# Altium PCB Daughter Board.PcbDoc
Units mil, origin at the board's own origin, x right, y up, seen from the top; angles counter-clockwise.
Board outline 4750 x 3250 mil, 4 copper layers (Top Layer, Layer 1, Layer 2, Bottom Layer), stack 23.756 mil thick; 7 components, 7 nets, 60 pads, 0 vias.
Unrouted connection lines stored in the file: 6.
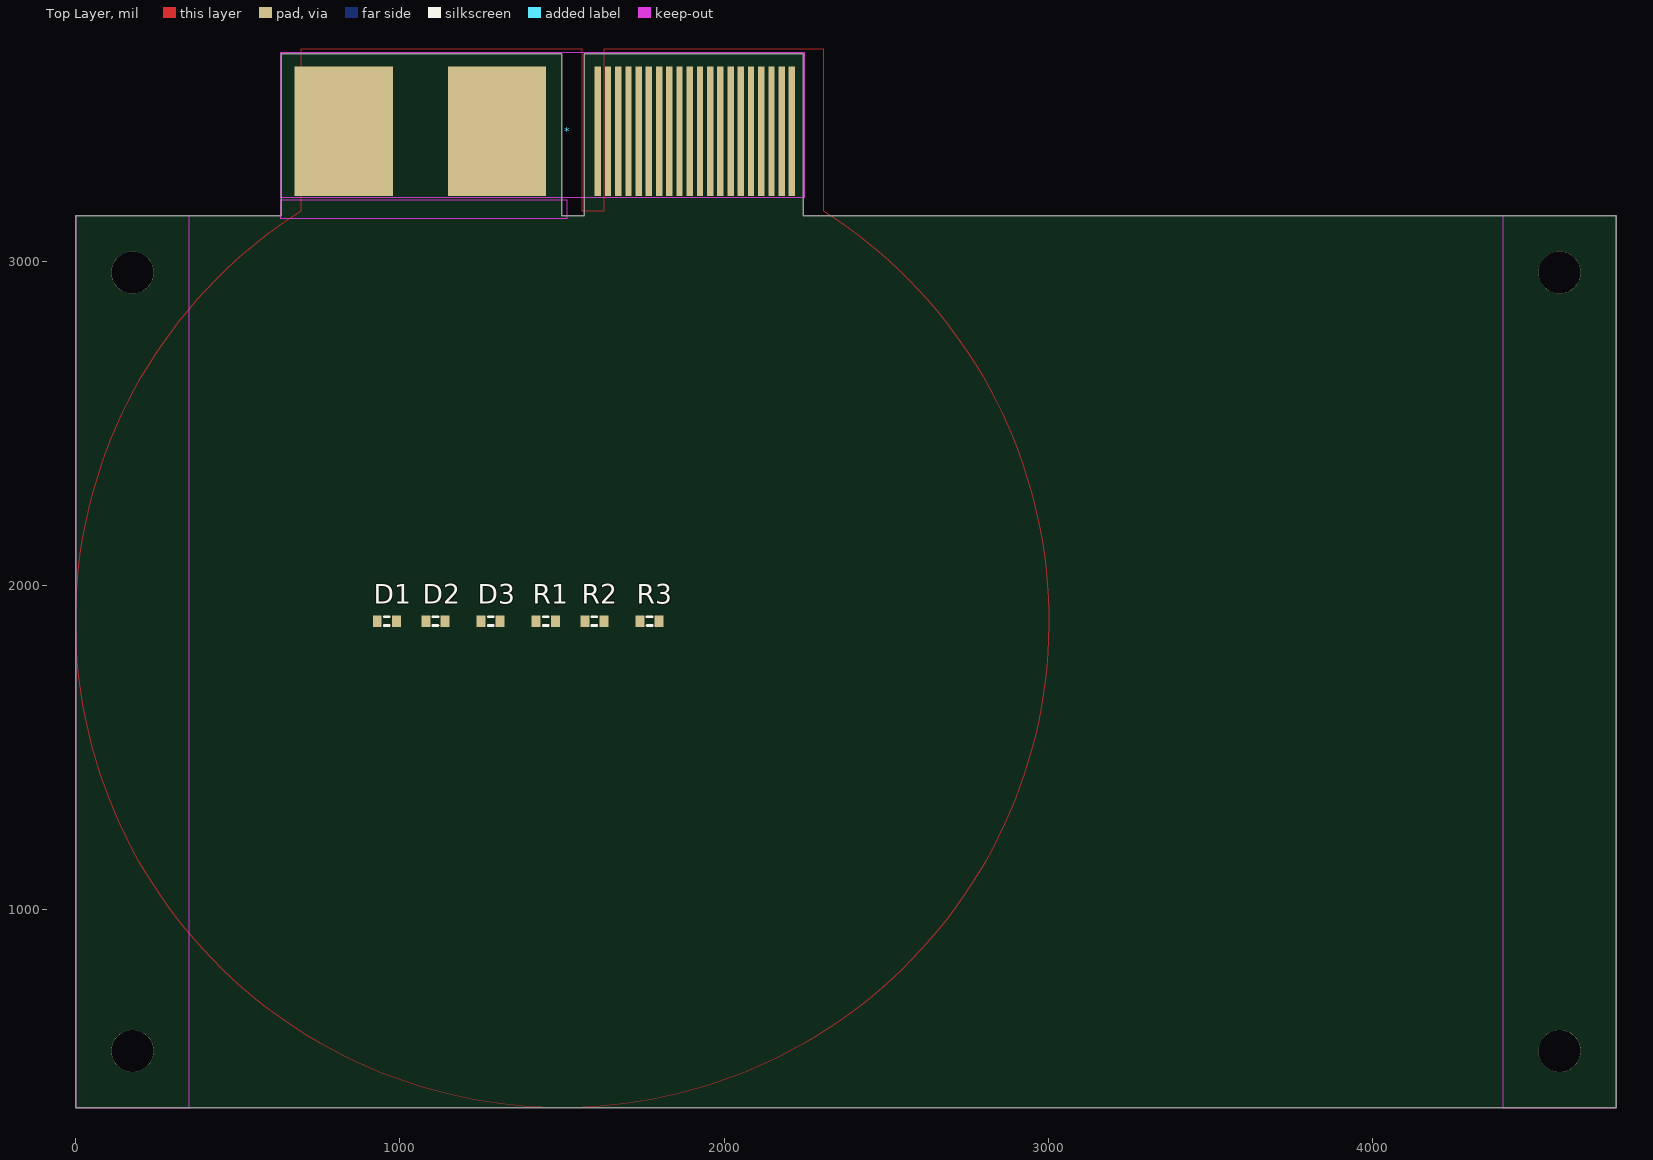
[diagram p0: Top Layer view]
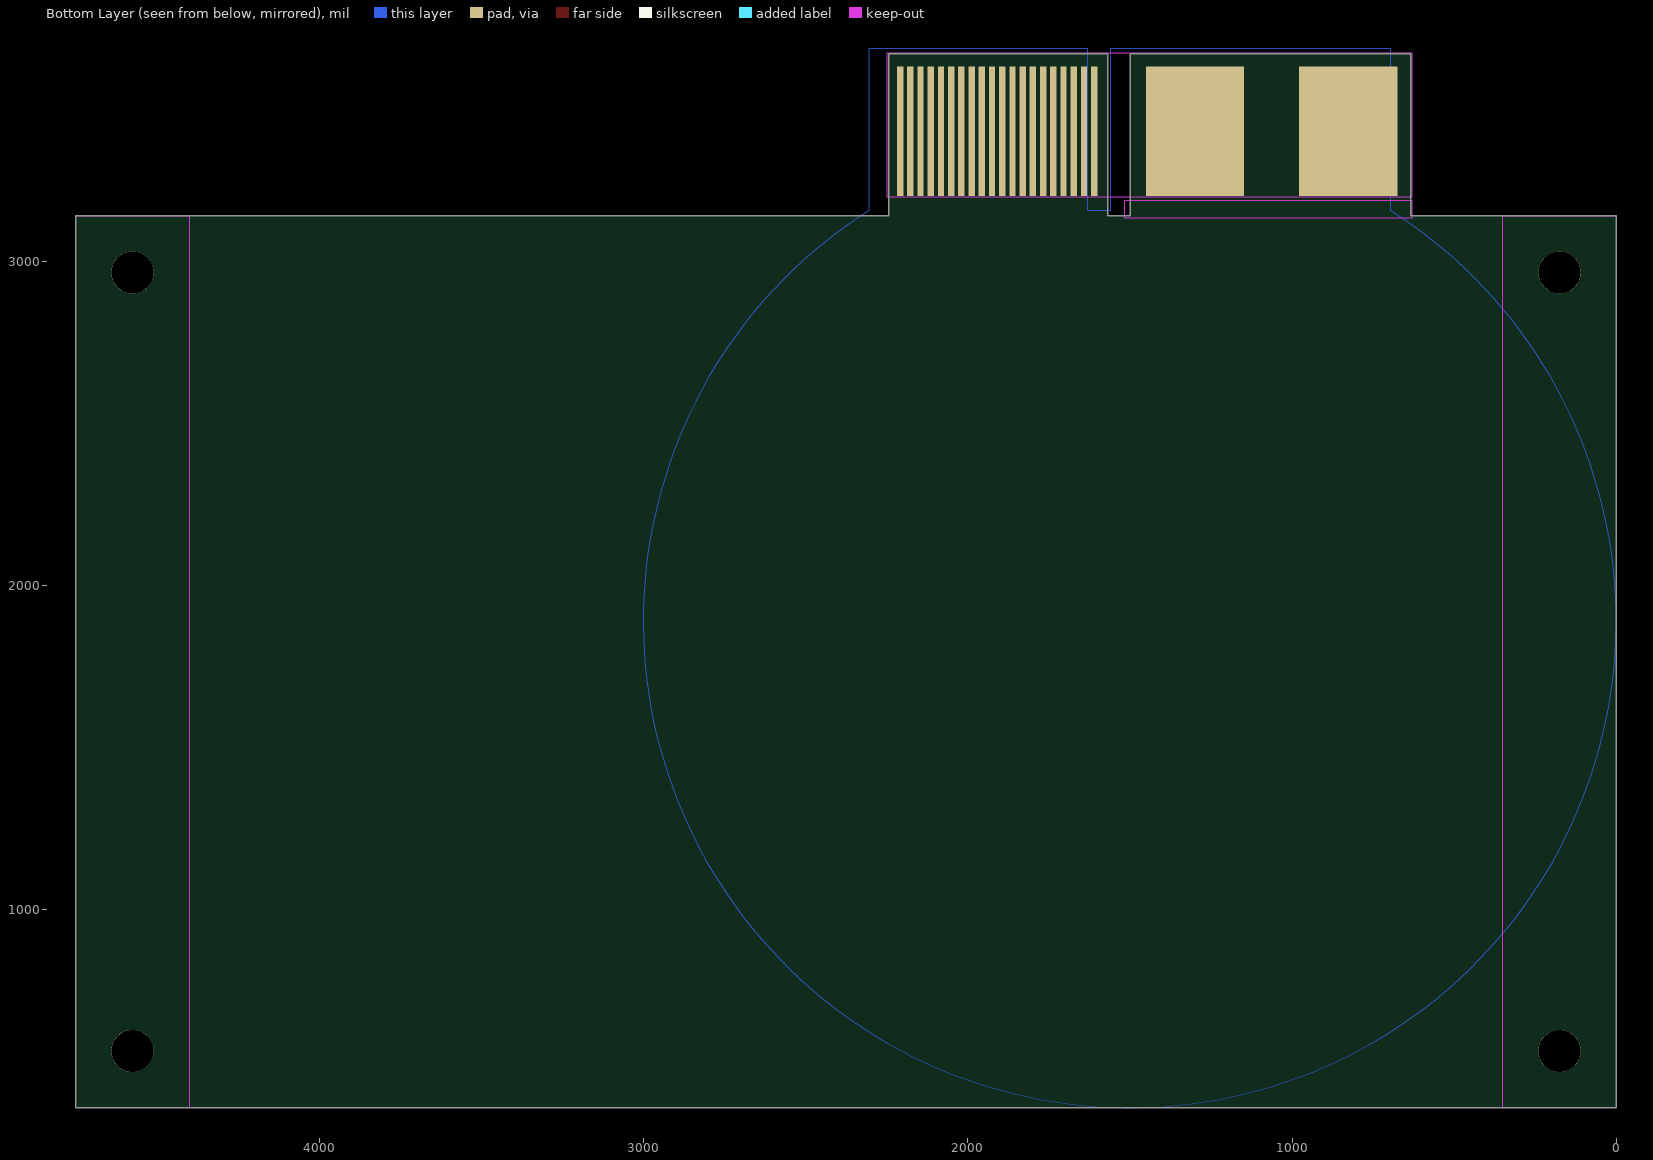
[diagram p1: Bottom Layer view, seen from below]
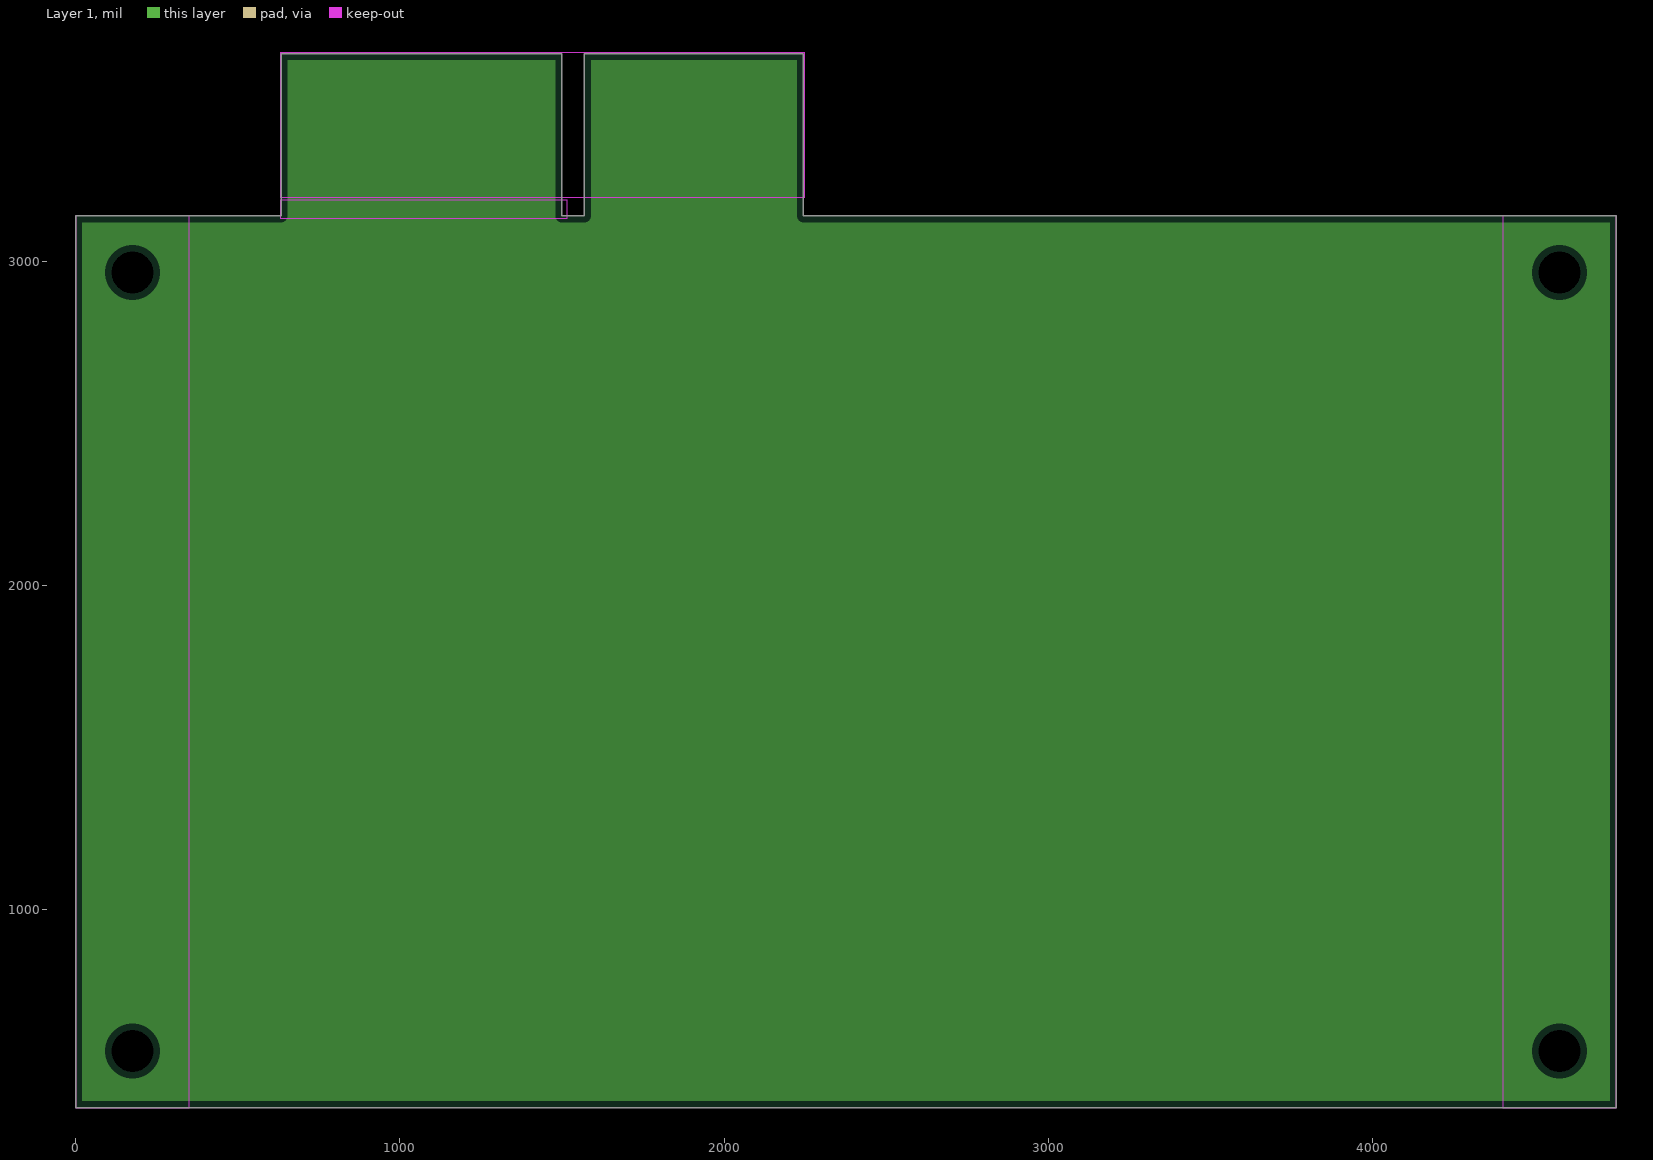
[diagram p2: Layer 1, clearances drawn from the general rule]
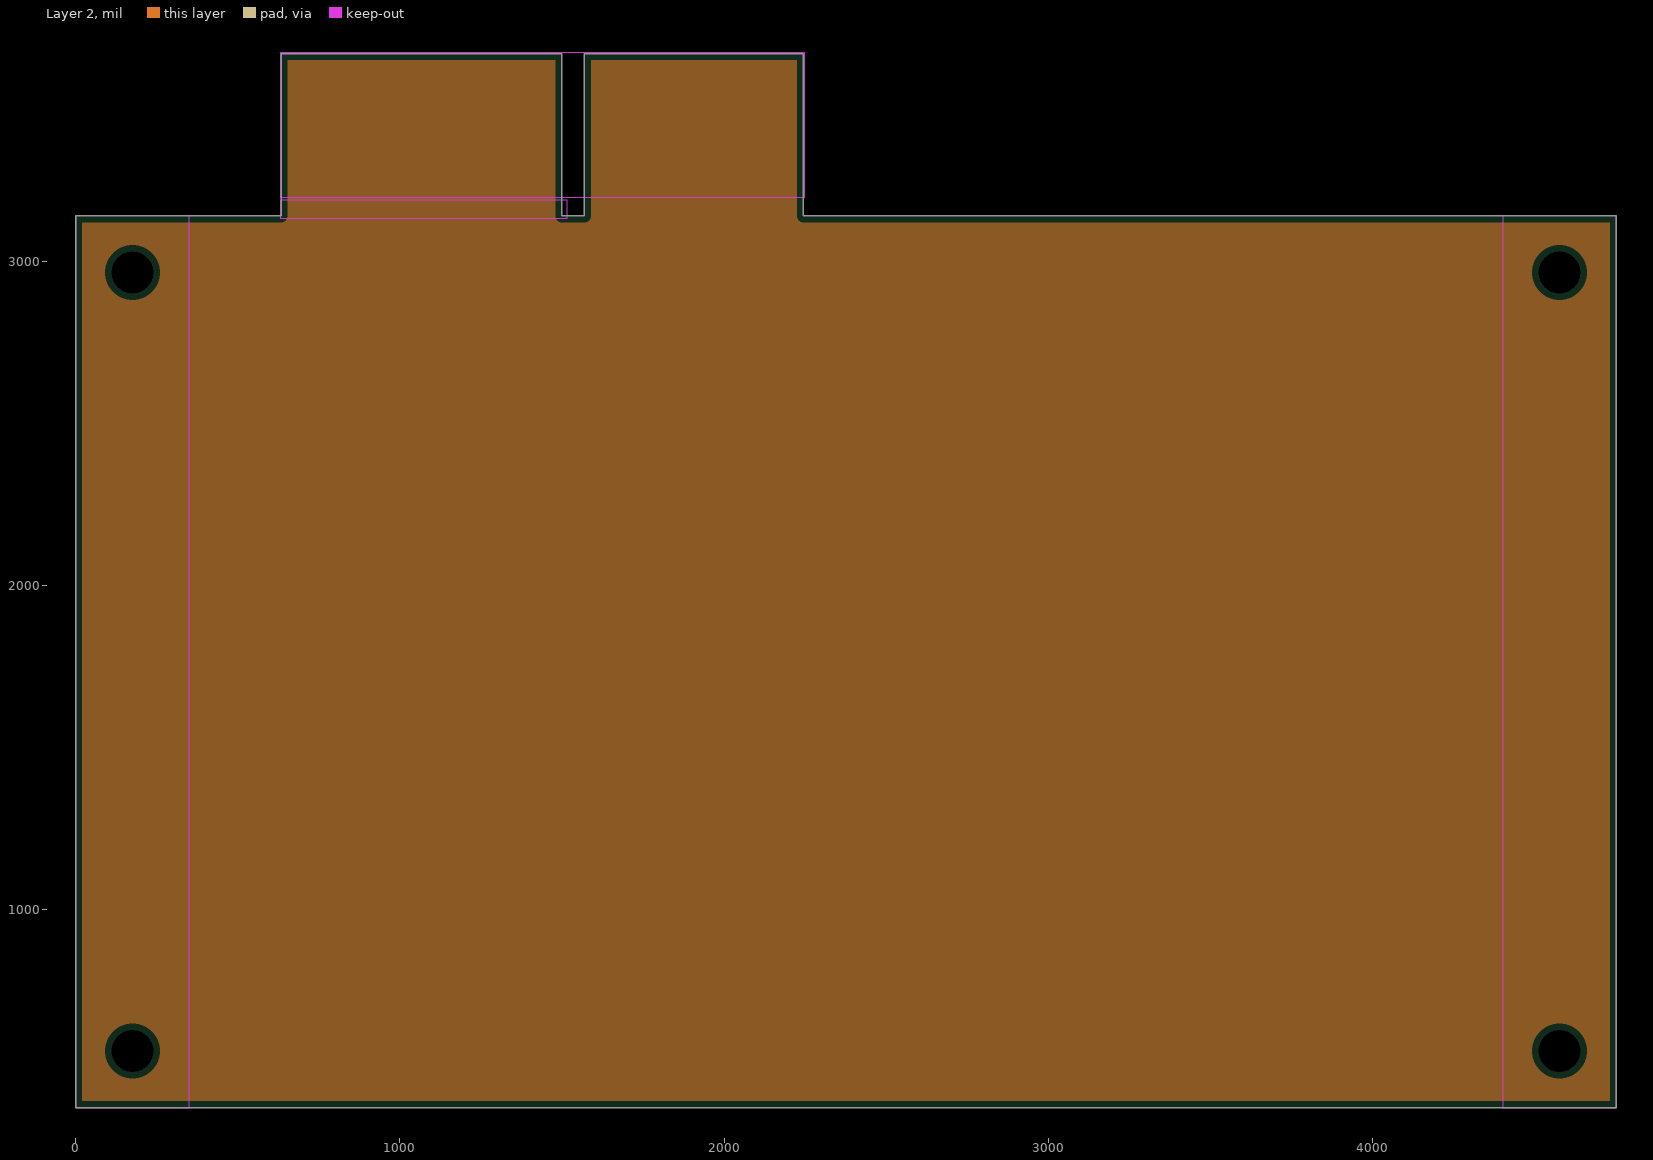
[diagram p3: Layer 2, clearances drawn from the general rule]

## Layer stack, top to bottom
Top Solder: solder mask 0.4, Solder Resist, Dk 3.5
Top Layer: signal copper 1.4
Dielectric 2: prepreg 2.8, PP-006, Dk 4.1
Layer 1: plane copper 1.378
Dielectric 1: dielectric 12.6, FR-4, Dk 4.8
Layer 2: plane copper 1.378
Dielectric 3: prepreg 2.8, PP-006, Dk 4.1
Bottom Layer: signal copper 1.4
Bottom Solder: solder mask 0.4, Solder Resist, Dk 3.5

## Board outline
0.5,389.5 0.5,3139.5 633.87,3139.5 633.87,3639.5 1498.87,3639.5 1498.87,3139.5 1568.87,3139.5 1568.87,3639.5 2243.86,3639.5 2243.86,3139.5 4750.5,3139.5 4750.5,389.5
cut-out: 2230,76045

## Design rules (kind name [scope] priority, off if disabled: settings)
Clearance [All] p1: gap=10 ignorepadtopadclearanceinfootprint=FALSE except(0: Arc-Hole Track-Hole SMDPad-Hole THPad-Hole Via-Hole Fill-Hole Poly-Hole Region-Hole Text-Hole)
PlaneClearance [All] p1: clearance=20
PlaneConnect [All] p1: planeconnectstyle=Relief reliefexpansion=20 reliefentries=4 reliefconductorwidth=10 reliefairgap=10
PolygonConnect [All] p1: connectstyle=Relief reliefconductorwidth=10 reliefentries=4 polygonreliefangle="90 Angle" airgapwidth=10
RoomDefinition "Daughter Board" [InComponentClass('Daughter Board')] p1: confinementstyle=ConfineIn formatcopy=TRUE lockcomponents=FALSE outline 630.5,3195 2250.5,3195 2250.5,3640 630.5,3640
RoutingVias [All] p1: holewidth=28 width=50 viastyle="Through Hole" minholewidth=28 minwidth=50 maxholewidth=28 maxwidth=50
SolderMaskExpansion [All] p1: expansion=4 istentingtop=FALSE
Width [All] p1: maxlimit=10 minlimit=5 preferedwidth=5 minimp=50.000000 maximp=50.000000 favimp=50.000000
28 further rules are at their usual default settings.

## Components (designator, comment, footprint, x,y, rotation, side; value= is the part's Value field where it differs from the comment)
* "HSEC8-120-01-L-PV-4-1" "HSEC8-120-01-L-PV-4-1 Gold Fingers" 1455.5,3417.25 r0 top
D1 "LED2" J1-0603 959.5,1890 r0 top
D2 "LED2" J1-0603 1109.5,1890 r0 top
D3 "LED2" J1-0603 1279.5,1890 r0 top
R1 "Res3" J1-0603 1449.5,1890 r0 top value=1K
R2 "Res3" J1-0603 1599.5,1890 r0 top value=1K
R3 "Res3" J1-0603 1769.5,1890 r0 top value=1K

## Footprints (in the part's own frame and the unit in brackets; to place one, negate y for a bottom-side part, rotate by r counter-clockwise, add the part's x,y. Pads: shape width x height; smd on the part's side, far side on the other; paste and mask are expansions set on the pad)
"HSEC8-120-01-L-PV-4-1 Gold Fingers" [mil]
  rect 303x400 smd: 0(-629,-17.25) 1(-156,-17.25)
  rect 19.68x400 smd: 2(154.5,-17.25) 3(186,-17.25) 4(217.5,-17.25) 5(249,-17.25) 6(280.5,-17.25) 7(312,-17.25) 8(343.5,-17.25) 9(375,-17.25) 10(406.5,-17.25) 11(438,-17.25) 12(469.5,-17.25) 13(501,-17.25) 14(532.5,-17.25) 15(564,-17.25) 16(595.5,-17.25) 17(627,-17.25) 18(658.5,-17.25) 19(690,-17.25) 20(721.5,-17.25) 21(753,-17.25)
  rect 303x400 smd far side: 22(-629,-17.25) 23(-156,-17.25)
  rect 19.68x400 smd far side: 24(154.5,-17.25) 25(186,-17.25) 26(217.5,-17.25) 27(249,-17.25) 28(280.5,-17.25) 29(312,-17.25) 30(343.5,-17.25) 31(375,-17.25) 32(406.5,-17.25) 33(438,-17.25) 34(469.5,-17.25) 35(501,-17.25) 36(532.5,-17.25) 37(564,-17.25) 38(595.5,-17.25) 39(627,-17.25) 40(658.5,-17.25) 41(690,-17.25) 42(721.5,-17.25) 43(753,-17.25)
  Keep-Out Layer region: -825,-220 792.61,-220 792.61,225 -825,225
  Keep-Out Layer region: -825,-285 60,-285 60,-230 -825,-230
  Keep-Out Layer region: -820,220
J1-0603 [mm] "Chip Resistor, Body 1.6x0.8mm, IPC High Density"
  rect 0.7x0.9 smd: 1(-0.75,0) 2(0.75,0)
  silkscreen extent -0.2,-0.35 0.2,0.35, body extent -0.85,-0.48 0.85,0.48, height 0.9

## Part data
D1 D2 D3: "Typical RED, GREEN, YELLOW, AMBER GaAs LED", LatestRevisionDate=17-Jul-2002, LatestRevisionNote="Re-released for DXP Platform.", PackageDescription="SM LED; 2 Flat Leads", PackageReference=3.2X1.6X1.1, PackageVersion=Feb-2002, Published=8-Jun-2000, Publisher="Altium Limited"
R1 R2 R3: "Resistor", LatestRevisionDate=29-May-2009, LatestRevisionNote="IPC-7351 Footprint Added.", PackageDescription="Chip Resistor", PackageReference=J1-0603, Published=8-Jun-2000, Publisher="Altium Limited"
*: Supplier 1=Mouser

## Free pads (board coordinates)
  round 130 hole 130 unplated: 5(175.5,2964.5) 6(175.5,564.5) 7(4575.5,564.5) 8(4575.5,2964.5)

## Nets (pads, with @x,y where several pads share a name; then routed paths per layer and width w, separated by ;. In a path a pad name is that pad's centre, name@x,y a point inside that pad or via, vN(x,y) a via of type N, cw(c..) or ccw(c..) an arc to the next point about the centre after c; other vN are vias at no path point)
1V8: *.23 R3.2
3V3: *.0 R2.1
5V0: *.1 R1.1
GND: *.22 D1.2 D2.2 D3.2
NetD1_1: D1.1 R1.2
NetD2_1: D2.1 R2.2
NetD3_1: D3.1 R3.1
pads on no net: *.2 *.3 *.4 *.5 *.6 *.7 *.8 *.9 *.10 *.11 *.12 *.13 *.14 *.15 *.16 *.17 *.18 *.19 *.20 *.21 *.24 *.25 *.26 *.27 *.28 *.29 *.30 *.31 *.32 *.33 *.34 *.35 *.36 *.37 *.38 *.39 *.40 *.41 *.42 *.43

## Polygon pours and split planes (outlines as drawn)
GND on Top Layer "Top Layer-No Net" (solid, shelved, pour order 0): 695.5,3155.19 695.5,3655.19 1560.5,3655.19 1560.5,3155.19 1630.5,3155.19 1630.5,3655.19 2305.5,3655.19 2305.5,3155.19 cw(c1500.5,1889.5)
GND on Bottom Layer "Top Layer-No Net1" (solid, shelved, pour order 1): 695.5,3155.19 695.5,3655.19 1560.5,3655.19 1560.5,3155.19 1630.5,3155.19 1630.5,3655.19 2305.5,3655.19 2305.5,3155.19 cw(c1500.5,1889.5)
no net on Layer 1 (split plane): 2223.77,3139.5 2224.15,3135.58 2225.3,3131.81 2227.16,3128.34 2229.65,3125.29 2232.7,3122.79 2236.17,3120.94 2239.94,3119.79 2243.86,3119.41 4730.4,3119.41 4730.4,409.6 20.6,409.6 20.6,3119.41 633.87,3119.41 637.79,3119.79 641.56,3120.94 645.03,3122.79 648.08,3125.29 650.57,3128.34 652.43,3131.81 653.58,3135.58 653.96,3139.5 653.96,3619.41 1478.77,3619.41 1478.77,3139.5 1479.15,3135.58 1480.3,3131.81 1482.16,3128.34 1484.65,3125.29 1487.7,3122.79 1491.17,3120.94 1494.94,3119.79 1498.87,3119.41 1568.87,3119.41 1572.79,3119.79 1576.56,3120.94 1580.03,3122.79 1583.08,3125.29 1585.57,3128.34 1587.43,3131.81 1588.58,3135.58 1588.96,3139.5 1588.96,3619.41 2223.77,3619.41
no net on Layer 2 (split plane): 2223.77,3139.5 2224.15,3135.58 2225.3,3131.81 2227.16,3128.34 2229.65,3125.29 2232.7,3122.79 2236.17,3120.94 2239.94,3119.79 2243.86,3119.41 4730.4,3119.41 4730.4,409.6 20.6,409.6 20.6,3119.41 633.87,3119.41 637.79,3119.79 641.56,3120.94 645.03,3122.79 648.08,3125.29 650.57,3128.34 652.43,3131.81 653.58,3135.58 653.96,3139.5 653.96,3619.41 1478.77,3619.41 1478.77,3139.5 1479.15,3135.58 1480.3,3131.81 1482.16,3128.34 1484.65,3125.29 1487.7,3122.79 1491.17,3120.94 1494.94,3119.79 1498.87,3119.41 1568.87,3119.41 1572.79,3119.79 1576.56,3120.94 1580.03,3122.79 1583.08,3125.29 1585.57,3128.34 1587.43,3131.81 1588.58,3135.58 1588.96,3139.5 1588.96,3619.41 2223.77,3619.41

## Keep-outs
Keep-Out Layer:
  rectangle: 4400,390 4750,3140
  rectangle: 0,390 350,3140

## Silkscreen, mask and mechanical layers (free items; w line width, h text height)
Mechanical 1:
  circle w0.5: c4575.5,564.5 r64.25
  circle w0.5: c4575.5,2964.5 r64.25
  circle w0.5: c175.5,2964.5 r64.25
  circle w0.5: c175.5,564.5 r64.25
  lines w0.5: 629.37,3639.5 1494.37,3639.5 ; 633.87,3639.5 633.87,3139.5 0.5,3139.5 0.5,389.5 4750.5,389.5 4750.5,3139.5 2243.86,3139.5 2243.86,3639.5 ; 1498.87,3639.5 1498.87,3139.5 1568.87,3139.5 1568.87,3639.5 ; 1564.37,3639.5 2239.36,3639.5